# EAGLE board TakpadV4 (EAGLE 8.4.0)
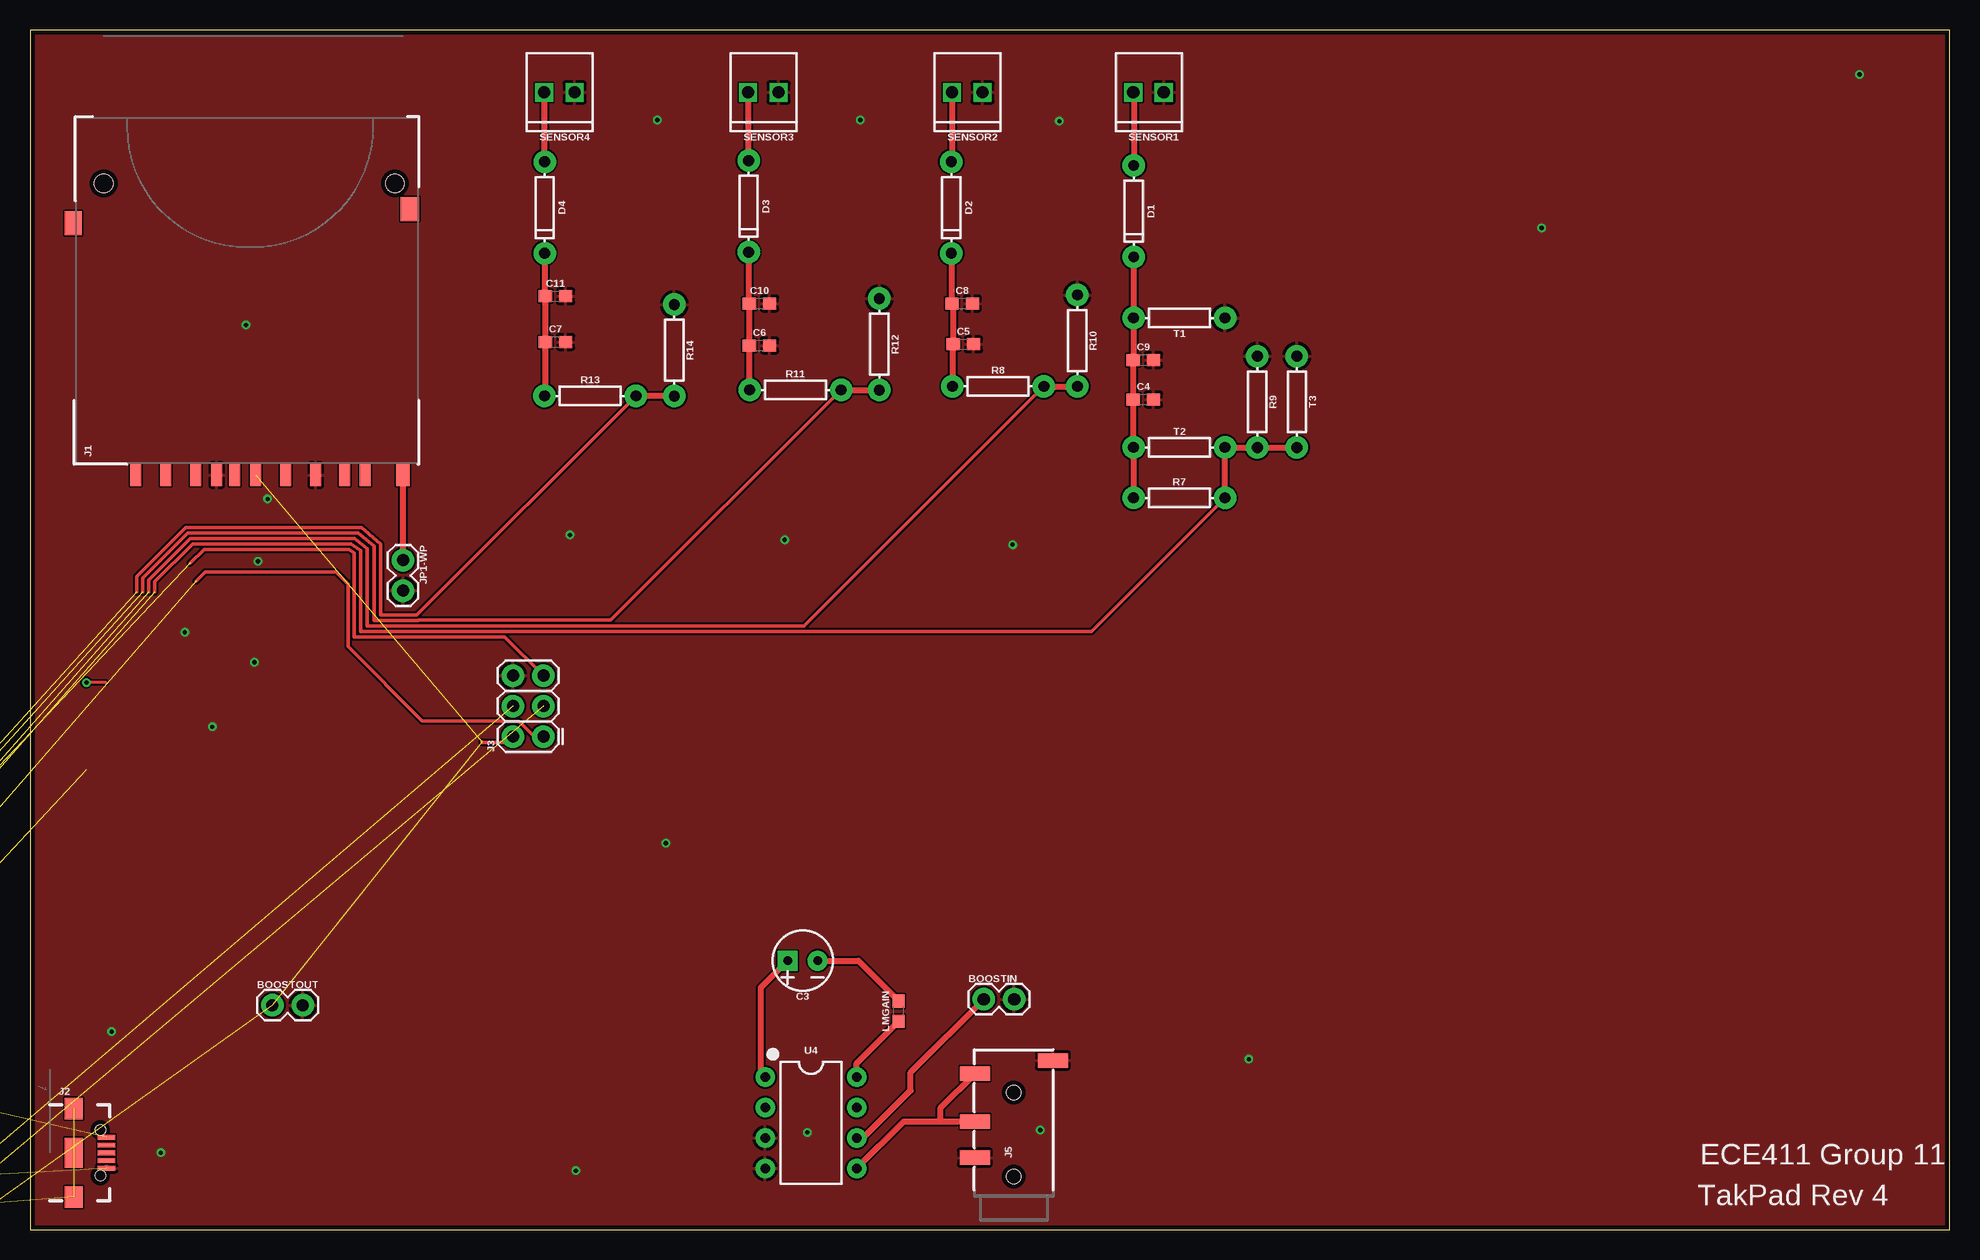
[diagram p0: board, top side]
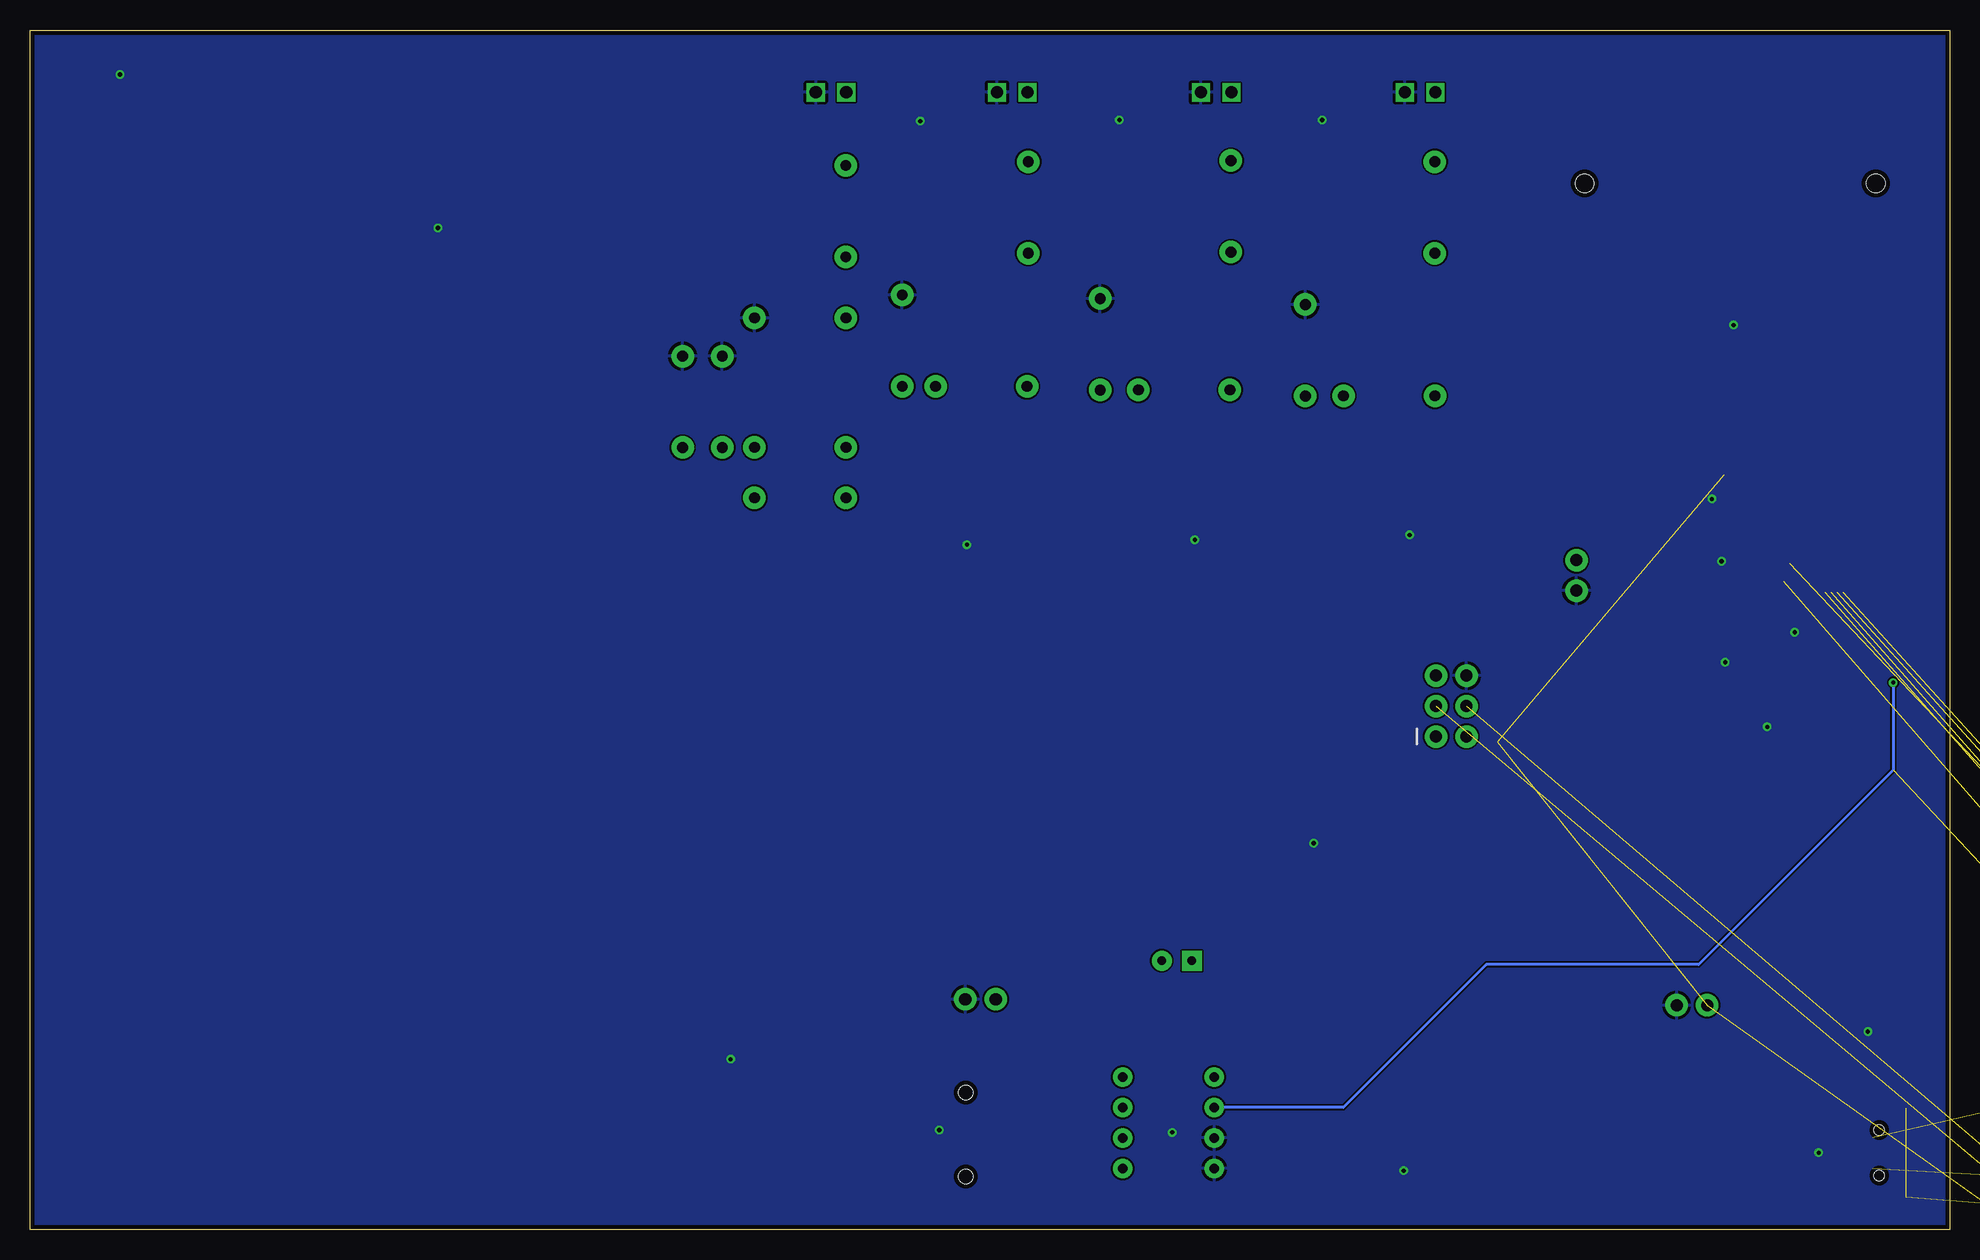
[diagram p1: board, bottom side, seen from below]

Size 160 x 100 mm. Coordinates in mm from the lower left corner, seen from the top.
Outline: 0,0 160,0 160,100 0,100 0,0
Copper layers (1*16): Top 0.0356mm / dielectric 1.5011mm / Bottom 0.0356mm
Design rules "osh-park-2-layers-design-rules": minimum track width 6mil, minimum drill 10mil, track to track 6mil, track to pad 6mil, pad to pad 6mil, via to via 6mil, smd to smd 6mil, copper to edge 15mil, drill to drill 6mil, minimum pad ring 7mil, minimum via ring 7mil, stop-mask expansion 3mil, vias tented up to drill 0mil, thermal gap 10mil

## Footprints (pad centres in the part's own frame; a part is rotated, then mirrored left to right if it is on the bottom)
1X02 = drill 1.016 pad 1.88: 1 0,0; 2 2.54,0
C025-024X044 = drill 0.813 octagon: 1 -1.27,0; 2 1.27,0
CPOL-RADIAL-2.5MM-5MM-KIT = drill 0.7 pad 1.651 square: 1 1.25,0 | drill 0.7 pad 1.651: 2 -1.25,0
0603 = smd 1.1 x 1: 1 -0.85,0; 2 0.85,0
C0402 = smd 0.7 x 0.9: 1 -0.65,0; 2 0.65,0
DIODE-1N4148 = drill 0.9 pad 1.88: A -3.81,0; C 3.81,0
SMA-DIODE = smd 1.27 x 1.47: A -2.15,0; C 2.15,0
LED-1206 = smd 1.2 x 1.4: A -1.5,0; C 1.5,0
SD = smd 1.8 x 0.9: 1 -1,6.77; 2 -1,4.27; 3 -1,2.52; 4 -1,-0.73; 5 -1,-3.23; 6 -1,-5.73; 7 -1,-8.15; 8 -1,-9.85; 9 -1,9.27; CD -1,1.02 | smd 2 x 1.4: SH@1 20,14.496 | smd 2 x 1.527: SH@2 21.15,-13.589 | smd 1.8 x 1.1: WP -1,-13 | hole 1.55: 23.3,11.94; 23.3,-12.32
USB-B-MICRO-SMD_RED_PASTE = smd 1.45 x 0.4: D+ 2.725,0; D- 2.725,0.65; GND 2.725,-1.3; ID 2.725,-0.65; VBUS 2.725,1.3 | smd 1.5 x 1.8: SHIELD1 0,3.685; SHIELD2 0,-3.685 | smd 1.5 x 2.5: SHIELD3 0,0 | hole 0.85: 2.2,1.9; 2.2,-1.9
2X3 = drill 1.016 pad 1.88: 1 0,0; 2 0,2.54; 3 2.54,0; 4 2.54,2.54; 5 5.08,0; 6 5.08,2.54
AUDIO_JACK_3.5MM_TRRS_SMD_RA = smd 1.2 x 2.5: EARTH 11.3,-3.25; RING1 6.2,3.25; RING2 3.2,3.25; TIP 10.2,3.25 | hole 1.2: 1.6,0; 8.6,0
M1206 = smd 1.6 x 2: 1 -1.4,0; 2 1.4,0
0204/5 = drill 0.813 octagon: 1 -2.54,0; 2 2.54,0
AXIAL-0.3 = drill 0.9 pad 1.88: P$1 -3.81,0; P$2 3.81,0
1X02_2.54_SCREWTERM = drill 1.016 square: P1 2.54,0; P2 0,0
TQFP32-08 = smd 1.27 x 0.559: 1 -4.293,2.8; 2 -4.293,2; 3 -4.293,1.2; 4 -4.293,0.4; 5 -4.293,-0.4; 6 -4.293,-1.2; 7 -4.293,-2; 8 -4.293,-2.8; 17 4.293,-2.8; 18 4.293,-2; 19 4.293,-1.2; 20 4.293,-0.4; 21 4.293,0.4; 22 4.293,1.2; 23 4.293,2; 24 4.293,2.8 | smd 0.559 x 1.27: 9 -2.8,-4.293; 10 -2,-4.293; 11 -1.2,-4.293; 12 -0.4,-4.293; 13 0.4,-4.293; 14 1.2,-4.293; 15 2,-4.293; 16 2.8,-4.293; 25 2.8,4.293; 26 2,4.293; 27 1.2,4.293; 28 0.4,4.293; 29 -0.4,4.293; 30 -1.2,4.293; 31 -2,4.293; 32 -2.8,4.293
DIP08 = drill 0.813 pad 1.626: 1 -3.81,-3.81; 2 -1.27,-3.81; 3 1.27,-3.81; 4 3.81,-3.81; 5 3.81,3.81; 6 1.27,3.81; 7 -1.27,3.81; 8 -3.81,3.81
IDH-AA-T1 = smd 0.4 x 0.18: BAT 0.9,0.8; CT 0.9,-0.8; EN -0.9,-0.4; GND -0.9,-0.8; ISET 0.9,-0.4; STAT1 -0.9,0.4; STAT2 -0.9,0; TERM 0.9,0; TS 0.9,0.4; VIN -0.9,0.8 | smd 0.9 x 1.7: EP 0,0

## Placement (x,y rotation side)
BATTERY  [1X02]  -85.14,-57 0 top  (outside the outline)
BOOSTIN  [1X02]  79.5,19.2 0 top
BOOSTOUT  [1X02]  20.2,18.7 0 top
C1  10u  [C025-024X044]  -61.24,-3.3 0 top  (outside the outline)
C2  10u  [C025-024X044]  -47.74,2 0 top  (outside the outline)
C3  10uF  [CPOL-RADIAL-2.5MM-5MM-KIT]  64.4,22.4 180 top
C4  47pF  [0603]  92.8,69.2 0 top
C5  47pF  [0603]  77.8,73.8 0 top
C6  47pF  [0603]  60.8,73.7 0 top
C7  47pF  [0603]  43.8,74 0 top
C8  1uF  [0603]  77.7,77.2 0 top
C9  1uF  [0603]  92.8,72.5 0 top
C10  1uF  [0603]  60.8,77.2 0 top
C11  1uF  [0603]  43.8,77.8 0 top
C12  0.1u  [C0402]  -93.14,0 0 top  (outside the outline)
C13  0.1u  [C0402]  -93.14,-5 0 top  (outside the outline)
C14  10u  [C025-024X044]  -88.1,-72.5 0 top  (outside the outline)
C15  0.1u  [C0402]  -106.9,-137.5 0 top  (outside the outline)
C16  0.1u  [C0402]  -106.9,-141.5 0 top  (outside the outline)
D1  200mA/100V/1V  [DIODE-1N4148]  92,84.9 270 top
D2  200mA/100V/1V  [DIODE-1N4148]  76.8,85.2 270 top
D3  200mA/100V/1V  [DIODE-1N4148]  59.9,85.3 270 top
D4  200mA/100V/1V  [DIODE-1N4148]  42.9,85.2 270 top
D5  2A/40V/360mV  [SMA-DIODE]  -34.34,21.1 0 top  (outside the outline)
D6  RED  [LED-1206]  -66.24,-12.3 0 top  (outside the outline)
D7  GREEN  [LED-1206]  -43.64,13.7 0 top  (outside the outline)
D8  2A/40V/360mV  [SMA-DIODE]  -92.14,-45 0 top  (outside the outline)
J1  SD_CARD_SOCKET  [SD]  18.09,63.9 90 top
J2  [USB-B-MICRO-SMD_RED_PASTE]  3.66,6.4 0 top
J3  AVR_SPI_PROG_3X2PTH  [2X3]  42.8,41.1 90 top
J4  [1X02]  -85.14,15 0 top  (outside the outline)
J5  AUDIO_JACK_TRRSSMD_RA  [AUDIO_JACK_3.5MM_TRRS_SMD_RA]  82,2.8 90 top
JP1  [1X02]  -60.02,13.32 0 top  (outside the outline)
JP1-WP  [1X02]  31.1,55.8 270 top
JP2  [1X02]  -99,-88 0 top  (outside the outline)
JP3  [1X02]  -99,-106.8 0 top  (outside the outline)
JP4  [1X02]  -99,-125.6 0 top  (outside the outline)
LMGAIN  1  [0603]  72.4,18.2 90 top
R1  1.5k  [M1206]  -92.14,-32 0 top  (outside the outline)
R2  1.5k  [M1206]  -92.14,-39 0 top  (outside the outline)
R3  13.3k  [M1206]  -92.14,-25 0 top  (outside the outline)
R4  1.87k  [M1206]  -92.14,-18 0 top  (outside the outline)
R5  10k  [0204/5]  -86.14,60 0 top  (outside the outline)
R6  10k  [0204/5]  -86.14,46 0 top  (outside the outline)
R7  470k  [AXIAL-0.3]  95.8,61 0 top
R8  470k  [AXIAL-0.3]  80.7,70.3 0 top
R9  150k  [AXIAL-0.3]  102.3,69 270 top
R10  150k  [AXIAL-0.3]  87.3,74.1 270 top
R11  470k  [AXIAL-0.3]  63.8,70 0 top
R12  150k  [AXIAL-0.3]  70.8,73.8 270 top
R13  470k  [AXIAL-0.3]  46.7,69.5 0 top
R14  150k  [AXIAL-0.3]  53.7,73.3 270 top
SENSOR1  [1X02_2.54_SCREWTERM]  94.5,94.8 180 top
SENSOR2  [1X02_2.54_SCREWTERM]  79.4,94.8 180 top
SENSOR3  [1X02_2.54_SCREWTERM]  62.4,94.8 180 top
SENSOR4  [1X02_2.54_SCREWTERM]  45.4,94.8 180 top
T1  0  [AXIAL-0.3]  95.8,76 180 top
T2  0  [AXIAL-0.3]  95.8,65.2 0 top
T3  0  [AXIAL-0.3]  105.6,69 270 top
U1  ATMEGA328P_TQFP  [TQFP32-08]  -102,-71.7 0 top  (outside the outline)
U4  LM386N  [DIP08]  65.1,8.9 270 top
U$1  AAT3693  [IDH-AA-T1]  -52.8,20.6 0 top  (outside the outline)

## Library data of the parts
BATTERY BOOSTIN BOOSTOUT J3 J4 SENSOR1-SENSOR4 = SparkFun-Connectors
C1 C2 C12-C16 R1-R6 = rcl
C3 = SparkFun-Capacitors; PROD_ID: CAP-08440
C4-C11 = SparkFun-Capacitors; PROD_ID: CAP-08913
D1-D4 = SparkFun-DiscreteSemi; PROD_ID: DIO-08378
D5 D8 = SparkFun-DiscreteSemi; PROD_ID: DIO-09886
D6 = SparkFun-LED; PROD_ID: DIO-09912
D7 = SparkFun-LED; PROD_ID: DIO-00862
J1 = SparkFun-Connectors; PROD_ID: CONN-11976; SF_ID: PRT-12769
J2 = SparkFun-Connectors; PROD_ID: CONN-11752
J5 = SparkFun-Connectors; PROD_ID: CONN-10676; SF_ID: PRT-12639; SPICEPREFIX: E
JP1 JP1-WP JP2-JP4 = SparkFun-Retired
LMGAIN = SparkFun-Resistors; PROD_ID: RES-08269
R7-R14 T1-T3 = SparkFun-Resistors; PROD_ID: RES-12182
U1 = SparkFun-IC-Microcontroller; PROD_ID: IC-09069
U4 = SparkFun-IC-Amplifiers; PROD_ID: IC-10899
U$1 = AAT3693

## Nets
AUDIOINPUT: U1.13 U4.2
AUDIOOUT: J5.RING1 J5.TIP U4.5
GND: BATTERY.1 BOOSTIN.2 BOOSTOUT.2 C1.2 C2.1 C4.2 C5.2 C6.2 C7.2 C8.2 C9.2 C10.2 C11.2 C12.2 C13.2 C14.2 C15.2 C16.2 J1.3 J1.6 J2.GND J3.6 J4.2 J5.EARTH J5.RING2 JP1-WP.2 R3.1 R4.1 R6.1 R9.P$1 R10.P$1 R12.P$1 R14.P$1 SENSOR1.P2 SENSOR2.P2 SENSOR3.P2 SENSOR4.P2 T1.P$1 T3.P$1 U1.3 U1.5 U4.3 U4.4 U$1.EP U$1.GND
MISO: J3.1 JP3.2 U1.16
MOSI: J3.4 JP2.1 U1.15
N$1: U1.14
N$2: JP1.1 U$1.EN
N$3: BATTERY.2 C2.2 D5.A U$1.BAT
N$4: R3.2 U$1.TERM
N$5: R4.2 U$1.ISET
N$6: C12.1 U$1.CT
N$7: C13.1 J2.SHIELD1 J2.SHIELD2 J2.SHIELD3
N$8: J3.3 JP4.2 U1.17
N$9: C3.1 U4.1
N$10: C3.2 LMGAIN.2
N$11: LMGAIN.1 U4.8
N$12: JP2.2
N$13: JP3.1
N$15: JP4.1
N$16: C15.1 U1.20
N$17: C16.1
RST: J3.5 U1.29
SENSOR1: D1.A SENSOR1.P1
SENSOR1IN: C4.1 C9.1 D1.C R7.P$1 T1.P$2 T2.P$1
SENSOR1OUT: R7.P$2 R9.P$2 T2.P$2 T3.P$2 U1.23
SENSOR2: D2.A SENSOR2.P1
SENSOR2IN: C5.1 C8.1 D2.C R8.P$1
SENSOR2OUT: R8.P$2 R10.P$2 U1.24
SENSOR3: D3.A SENSOR3.P1
SENSOR3IN: C6.1 C10.1 D3.C R11.P$1
SENSOR3OUT: R11.P$2 R12.P$2 U1.25
SENSOR4: D4.A SENSOR4.P1
SENSOR4IN: C7.1 C11.1 D4.C R13.P$1
SENSOROUT4: R13.P$2 R14.P$2 U1.26
STAT1: D7.C U$1.STAT1
STAT1LED: D7.A R1.1
STAT2: D6.C U$1.STAT2
STAT2LED: D6.A R2.1
TEMPSENSE: J4.1 R5.1 R6.2 U$1.TS
UPCONVERTERINPUT: BOOSTIN.1 U4.6
V+: BOOSTOUT.1 J1.4 J3.2 U1.4 U1.6
VCC: C14.1 D5.C D8.C R5.2
VIN: C1.1 D8.A J2.VBUS JP1.2 R1.2 R2.2 U$1.VIN
WP: J1.WP JP1-WP.1

## Tracks (layer width: path | path; a pad name or v marks a point on that pad's centre or on a via)
AUDIOINPUT  (via drill 0.35)  (1 unrouted)
  Top 0.254: 6.34,45.6 v4.7,45.6
  Bottom 0.254: v4.7,45.6 4.7,38.3 20.9,22.1 38.6,22.1 50.53,10.17 U4.2
AUDIOOUT
  Top 0.508: J5.RING1 76.3,9 | 76.3,9 75.9,9 75.9,10.15 J5.TIP | 76.3,9 72.82,9 U4.5
GND  (via drill 0.35)  (16 unrouted)
  other vias: 12.9,49.8 18.7,47.3 15.2,41.9 19.8,60.9 53,32.2 45.5,4.9 126,83.5 19,55.7 81.9,57.1 62.9,57.5 45,57.9 18,75.4 101.6,14.2 152.5,96.3 64.8,8.1 84.2,8.3 10.9,6.4 6.8,16.5 52.3,92.5 69.2,92.5 85.8,92.4
  pour Top: -3.4,108.3 -15.4,96.3 -15.4,-14.5 -12.6,-11.7 174.1,-11.7 170.9,-8.5 170.9,116.4 162.8,108.3
  pour Bottom: -5.2,104.9 -5.2,-6.7 -4.3,-5.8 166.9,-5.8 168.4,-4.3 168.4,103.4 -3.7,103.4
  pour Bottom: -3.2,100.3 -7.6,95.9 -7.6,-4.7 -6,-6.3 166.7,-6.3 173.1,0.1 173.1,103.4 -0.2,103.4 -3.3,100.3
MISO  (2 unrouted)
  Top 0.305: 13.87,54.07 14.6,54.8 25.5,54.8 26.5,53.8 26.5,48.6 32.7,42.4 39.3,42.4 39.35,42.34 40.78,42.34 42.02,41.1 J3.1
MOSI  (2 unrouted)
N$2  (1 unrouted)
N$3  (3 unrouted)
N$4  (1 unrouted)
N$5  (1 unrouted)
N$6  (1 unrouted)
N$7  (3 unrouted)
N$8  (2 unrouted)
N$9
  Top 0.508: C3.1 60.9,20.15 60.9,13.1 U4.1
N$10
  Top 0.508: C3.2 69.05,22.4 LMGAIN.2
N$11
  Top 0.508: U4.8 68.91,13.86 LMGAIN.1
N$16  (1 unrouted)
RST  (1 unrouted)
  Top 0.305: J3.5 39.58,49.4 27,49.4 27,56.4 26.6,56.7 14.5,56.7 13.37,55.57
SENSOR1
  Top 0.508: SENSOR1.P1 92,94.76 D1.A
SENSOR1IN
  Top 0.508: D1.C T1.P$2 91.99,72.54 C9.1 C4.1 91.95,65.24 T2.P$1 R7.P$1
SENSOR1OUT  (1 unrouted)
  Top 0.305: 10.39,53.15 10.39,54.01 13.54,57.16 26.79,57.16 27.56,56.59 27.56,49.86 88.47,49.86 R7.P$2
  Top 0.508: R7.P$2 T2.P$2 R9.P$2 T3.P$2
SENSOR2
  Top 0.508: SENSOR2.P1 76.86,89.07 D2.A
SENSOR2IN
  Top 0.508: D2.C 76.8,77.25 C8.1 76.95,77.1 C5.1 76.89,73.74 R8.P$1
SENSOR2OUT  (1 unrouted)
  Top 0.305: 9.89,53.15 9.89,54.15 13.36,57.61 27.08,57.61 28.11,56.78 28.11,50.31 64.52,50.31 R8.P$2
  Top 0.508: R8.P$2 R10.P$2
SENSOR3
  Top 0.508: SENSOR3.P1 59.86,89.15 D3.A
SENSOR3IN
  Top 0.508: D3.C 59.9,77.25 C10.1 C6.1 59.95,70.04 R11.P$1
SENSOR3OUT  (1 unrouted)
  Top 0.305: 9.39,53.15 9.39,54.3 13.17,58.07 27.37,58.07 28.67,56.97 28.67,50.77 32.37,50.77 32.4,50.8 48.41,50.8 R11.P$2
  Top 0.508: R11.P$2 R12.P$2
SENSOR4
  Top 0.508: SENSOR4.P1 42.86,89.05 D4.A
SENSOR4IN
  Top 0.508: D4.C 42.9,77.85 C11.1 C7.1 42.95,69.56 R13.P$1
SENSOROUT4  (1 unrouted)
  Top 0.305: 8.89,53.15 8.89,54.45 12.98,58.53 27.66,58.53 29.23,57.16 29.23,51.23 32.24,51.23 R13.P$2
  Top 0.508: R14.P$2 R13.P$2
STAT1  (1 unrouted)
STAT1LED  (1 unrouted)
STAT2  (1 unrouted)
STAT2LED  (1 unrouted)
TEMPSENSE  (3 unrouted)
UPCONVERTERINPUT
  Top 0.508: U4.6 69.43,7.63 73.4,11.6 73.4,13.1 BOOSTIN.1
V+  (4 unrouted)
  Top 0.305: 37.67,40.63 37.7,40.6 39.76,40.6 J3.2
VCC  (3 unrouted)
VIN  (6 unrouted)
WP
  Top 0.508: JP1-WP.1 J1.WP

## Text on the board
tPlace: ECE411 Group 11 | TakPad Rev 4